# EAGLE board emonTx4-PiZero (EAGLE 9.6.2)
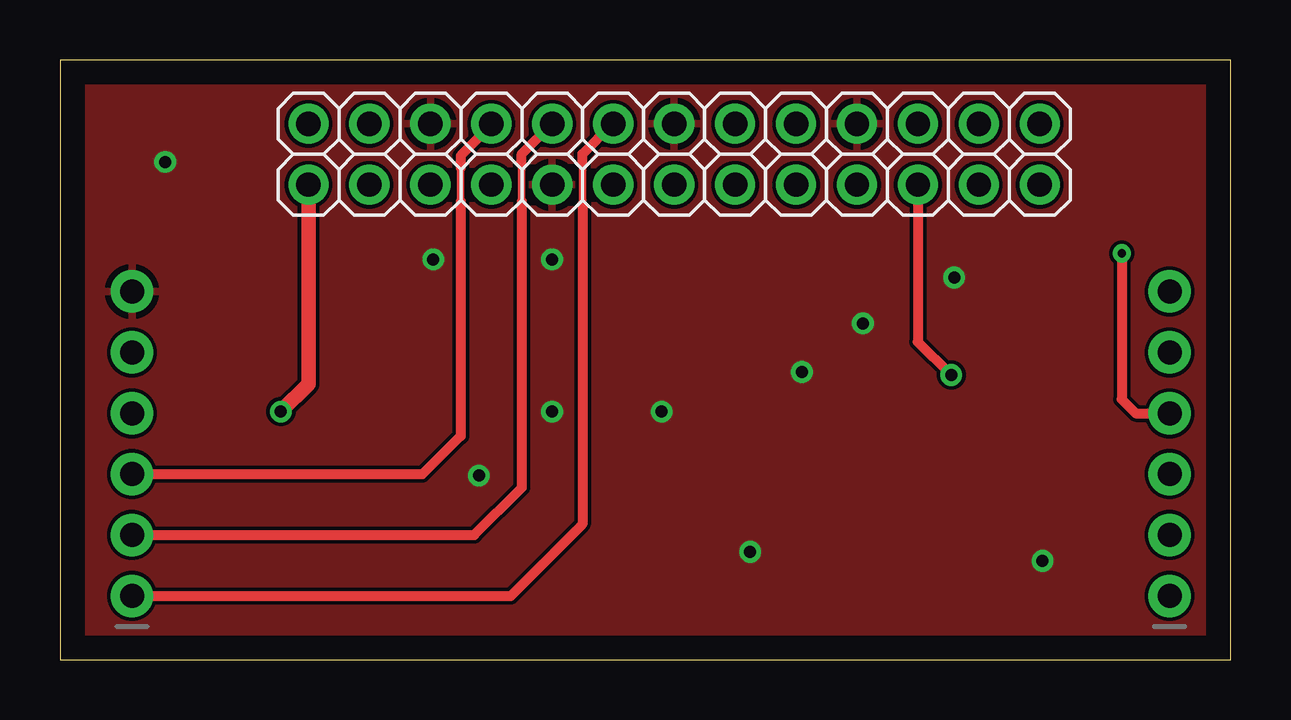
[diagram p0: board, top side]
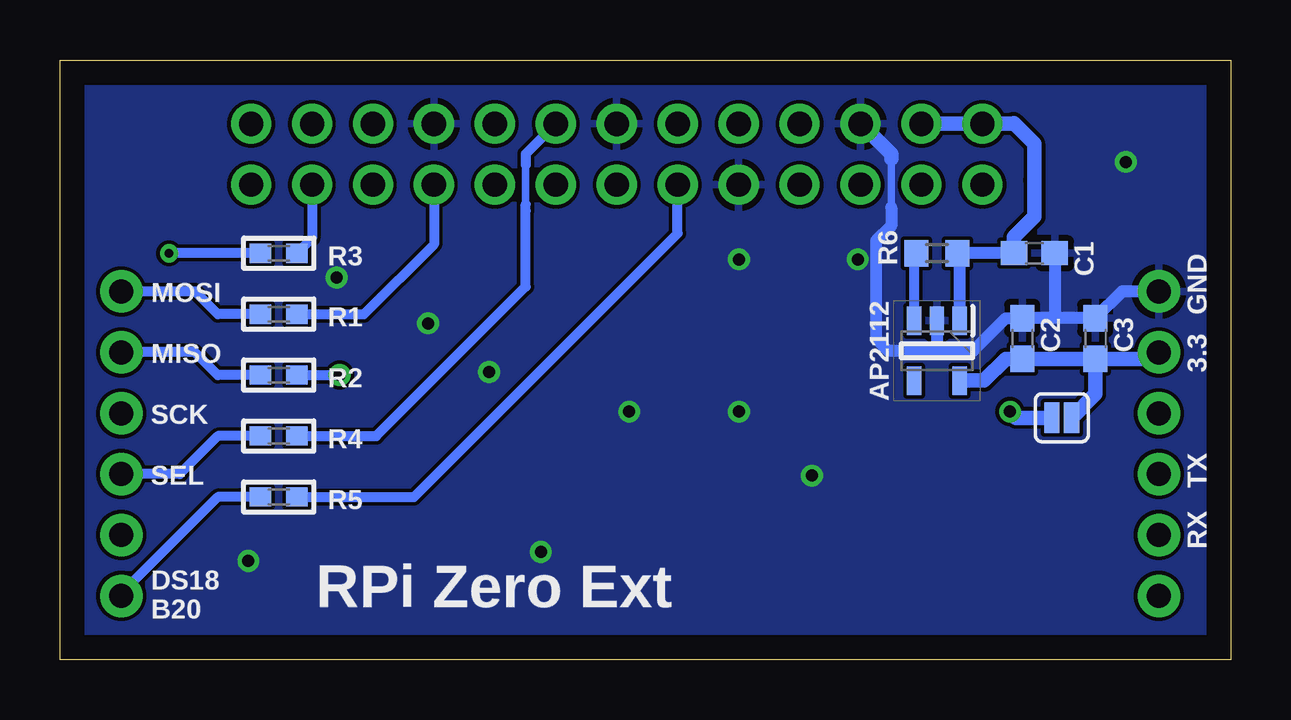
[diagram p1: board, bottom side, seen from below]

Size 48.81 x 25 mm. Coordinates in mm from the lower left corner, seen from the top.
Outline: 48.81,0 48.81,25 0,25 0,0 48.81,0
Copper layers (1*16): Top 0.035mm / dielectric 1.5mm / Bottom 0.035mm
Design rules "default *": minimum track width 6mil, minimum drill 0.35mm, track to track 6mil, track to pad 6mil, pad to pad 6mil, via to via 6mil, smd to smd 6mil, copper to edge 40mil, drill to drill 6mil, minimum pad ring 10mil, minimum via ring 8mil, stop-mask expansion 4mil, vias tented up to drill 0.6mm, thermal gap 10mil
Net classes: 1 power: width 0.254 mm, drill 0.5 mm, clearance 0.152 mm; 2 gnd: width 0.254 mm, drill 0.5 mm, clearance 0.152 mm

## Footprints (pad centres in the part's own frame; a part is rotated, then mirrored left to right if it is on the bottom)
SJ_2S = smd 0.635 x 1.27: 1 -0.412,0; 2 0.412,0
SOT95P282X130-5N = smd 1.2 x 0.6: 1 -1.25,0.95; 2 -1.25,0; 3 -1.25,-0.95; 4 1.25,-0.95; 5 1.25,0.95
C0603 = smd 1.1 x 1: 1 -0.85,0; 2 0.85,0
1X06_ROUND_70 = drill 1 pad 1.778: 1 -6.35,0; 2 -3.81,0; 3 -1.27,0; 4 1.27,0; 5 3.81,0; 6 6.35,0
1X13-BIG = drill 1.016 pad 1.676: 1 -15.24,0; 2 -12.7,0; 3 -10.16,0; 4 -7.62,0; 5 -5.08,0; 6 -2.54,0; 7 0,0; 8 2.54,0; 9 5.08,0; 10 7.62,0; 11 10.16,0; 12 12.7,0; 13 15.24,0
_0603 = smd 0.9 x 0.8: 1 -0.762,0; 2 0.762,0
R0603 = smd 1 x 1.1: 1 -0.85,0; 2 0.85,0

## Placement (x,y rotation side)
3.3V_LINK  SOLDERJUMPERNC  [SJ_2S]  7.05,10.08 180 bottom
AP2112  AP2112K-3.3TRG1  [SOT95P282X130-5N]  12.26,12.88 270 bottom
C1  1uF 6V  [C0603]  8.19,16.94 180 bottom
C2  1uF 6V  [C0603]  8.7,13.38 270 bottom
C3  100nF  [C0603]  5.65,13.38 270 bottom
JP1  FTDI  [1X06_ROUND_70]  3,9 90 top
JP2  FTDI  [1X06_ROUND_70]  46.25,9 90 top
JP5  [1X13-BIG]  25.6,22.34 0 top
JP6  [1X13-BIG]  25.6,19.8 0 top
R1  1k  [_0603]  39.69,14.4 180 bottom
R2  1k  [_0603]  39.69,11.86 180 bottom
R3  1k  [_0603]  39.69,16.94 180 bottom
R4  1k  [_0603]  39.69,9.32 0 bottom
R5  1k  [_0603]  39.69,6.78 180 bottom
R6  10K  [R0603]  12.26,16.94 180 bottom

## Library data of the parts
3.3V_LINK = SparkFun
AP2112 = AP2112K-3.3TRG1; ARROW_PART_NUMBER: AP2112K-3.3TRG1; ARROW_PRICE-STOCK: https://www.arrow.com/en/products/ap2112k-3.3trg1/diodes-incorporated?region=nac; DESCRIPTION: 600mA 3.3V LDO Regulator Enable SOT23-5 DiodesZetex AP2112K-3.3TRG1, LDO Voltage Regulator, 3.3 V +/-1.5%, 2.5 6 Vin, 5-Pin SOT-23; HEIGHT: 1.3mm; MANUFACTURER_NAME: Diodes Inc.; MANUFACTURER_PART_NUMBER: AP2112K-3.3TRG1; MOUSER_PART_NUMBER: 621-AP2112K-3.3TRG1; MOUSER_PRICE-STOCK: https://www.mouser.co.uk/ProductDetail/Diodes-Incorporated/AP2112K-33TRG1?qs=x6A8l6qLYDDPYHosCdzh%2FA%3D%3D
C1-C3 = resistor
JP1 JP2 R1-R5 = microbuilder
JP5 JP6 = adafruit
R6 = rcl

## Nets
3.3V: 3.3V_LINK.1 AP2112.5 C2.2 C3.2 JP1.5
+5V [power]: AP2112.1 C1.2 JP5.1 JP5.2 R6.1
_RESET: JP1.1 JP5.6
AVR_RX: JP1.3 JP5.4
AVR_TX: JP1.2 JP5.5
DS18B20: JP2.1 R5.2
GND: AP2112.2 C1.1 C2.1 C3.1 JP1.6 JP5.3 JP5.7 JP5.10 JP6.5
N$1: JP5.8 R4.2
N$2: JP6.6 R5.1
N$3: 3.3V_LINK.2 JP6.1
N$10: JP6.10 R1.1
N$11: JP6.11 R2.1
N$12: JP6.12 R3.1
N$25: AP2112.3 R6.2
RFM_MISO: JP2.5 R2.2
RFM_MOSI: JP2.6 R1.2
RFM_SCK: JP2.4 R3.2
RFM_SEL: JP2.3 R4.1

## Tracks (layer width: path | path; a pad name or v marks a point on that pad's centre or on a via)
3.3V
  Bottom 0.61: 3.06,12.75 JP1.5 3.28,12.53 C3.2 | C3.2 C2.2 9.38,12.53 10.29,11.63 AP2112.5 | 3.3V_LINK.1 5.65,11.07 C3.2
+5V
  Bottom 0.508: AP2112.1 11.31,16.84 R6.1 C1.2
  Bottom 0.61: C1.2 9.04,17.61 8.19,18.46 8.19,19.98 8.2,19.98 8.2,21.51 9.05,22.37 9.08,22.34 JP5.1 JP5.2
_RESET
  Top 0.305: 21.78,20.62 21.78,18.97
  Top 0.406: JP1.1 18.79,2.65 21.78,5.64 21.78,18.97 | 21.78,20.62 21.78,21.08 23.04,22.34 JP5.6
AVR_RX
  Top 0.305: 16.7,20.5 16.7,19.1
  Top 0.406: JP1.3 15.11,7.73 16.7,9.32 16.7,19.1 | 16.7,20.5 16.7,21 17.99,22.29 JP5.4
AVR_TX
  Top 0.305: 19.24,20.62 19.24,19.1
  Top 0.406: JP1.2 17.27,5.19 19.24,7.16 19.24,19.1 | 19.24,20.62 19.24,21.08 20.5,22.34 JP5.5
DS18B20
  Bottom 0.406: R5.2 42.23,6.78 46.25,2.76 JP2.1
GND  (via drill 0.5)
  Bottom 0.305: 14.16,20.88 14.16,18.84
  Bottom 0.508: 14.16,18.84 14.16,18.08 14.8,17.45 14.8,13.38 14.29,12.88 12.26,12.88 | AP2112.2 12.26,12.88 | 12.26,12.88 10.73,12.88 9.37,14.23 C2.1 7.18,14.23 | 7.18,14.23 C3.1 4.54,15.35 JP1.6 | C1.1 7.34,14.4 7.18,14.23
  Bottom 0.61: 14.16,20.88 14.16,21.08 15.42,22.34 JP5.3
  other vias: 25.08,10.34 20.51,10.34 17.46,7.67 30.92,11.99 33.47,14.02 37.27,15.92 40.96,4.11 15.56,16.69 20.51,16.69 4.38,20.75 28.77,4.49
  pour Top: -1.27,26.4 -1.27,-0.18 49.27,-0.18 49.27,26.4
  pour Bottom: -0.63,25.77 -0.63,-0.68 49.77,-0.68 49.77,25.77
N$1
  Bottom 0.305: 29.4,21.08 29.4,18.72
  Bottom 0.406: R4.2 35.62,9.32 29.4,15.54 29.4,18.72 29.4,18.97 | JP5.8 29.4,21.08 29.4,20.62
N$2
  Bottom 0.406: R5.1 34.05,6.78 23.06,17.77 JP6.6
N$3  (via drill 0.5)
  Top 0.61: v9.21,10.34 10.36,11.49 JP6.1
  Bottom 0.61: 3.3V_LINK.2 8.95,10.08 v9.21,10.34
N$10
  Bottom 0.406: JP6.10 33.22,17.31 36.13,14.4 R1.1
N$11  (via drill 0.5)
  Top 0.406: JP6.11 35.76,13.25 v37.15,11.86
  Bottom 0.406: R2.1 v37.15,11.86
N$12
  Bottom 0.406: JP6.12 38.3,17.57 R3.1
N$25
  Bottom 0.406: R6.2 13.21,16.84 AP2112.3
RFM_MISO
  Bottom 0.406: R2.2 42.23,11.86 43.19,12.82 46.24,12.82 JP2.5
RFM_MOSI
  Bottom 0.406: JP2.6 43.18,15.35 42.23,14.4 R1.2
RFM_SCK  (via drill 0.35)
  Top 0.406: v44.26,16.94 44.26,10.84 44.83,10.27 JP2.4
  Bottom 0.406: R3.2 v44.26,16.94
RFM_SEL
  Bottom 0.406: R4.1 42.23,9.32 43.82,7.73 JP2.3

## Text on the board
bPlace: RPi Zero Ext
bNames: MOSI | GND | 3.3 | MISO | SCK | TX | SEL | RX | DS18 / B20